# Altium PCB JDY-23.PcbDoc
Units mm, origin at the board's own origin, x right, y up, seen from the top; angles counter-clockwise.
Board outline 29.14 x 29.14 mm, 2 copper layers (Top Layer, Bottom Layer); 2 components, 0 nets, 26 pads, 0 vias.
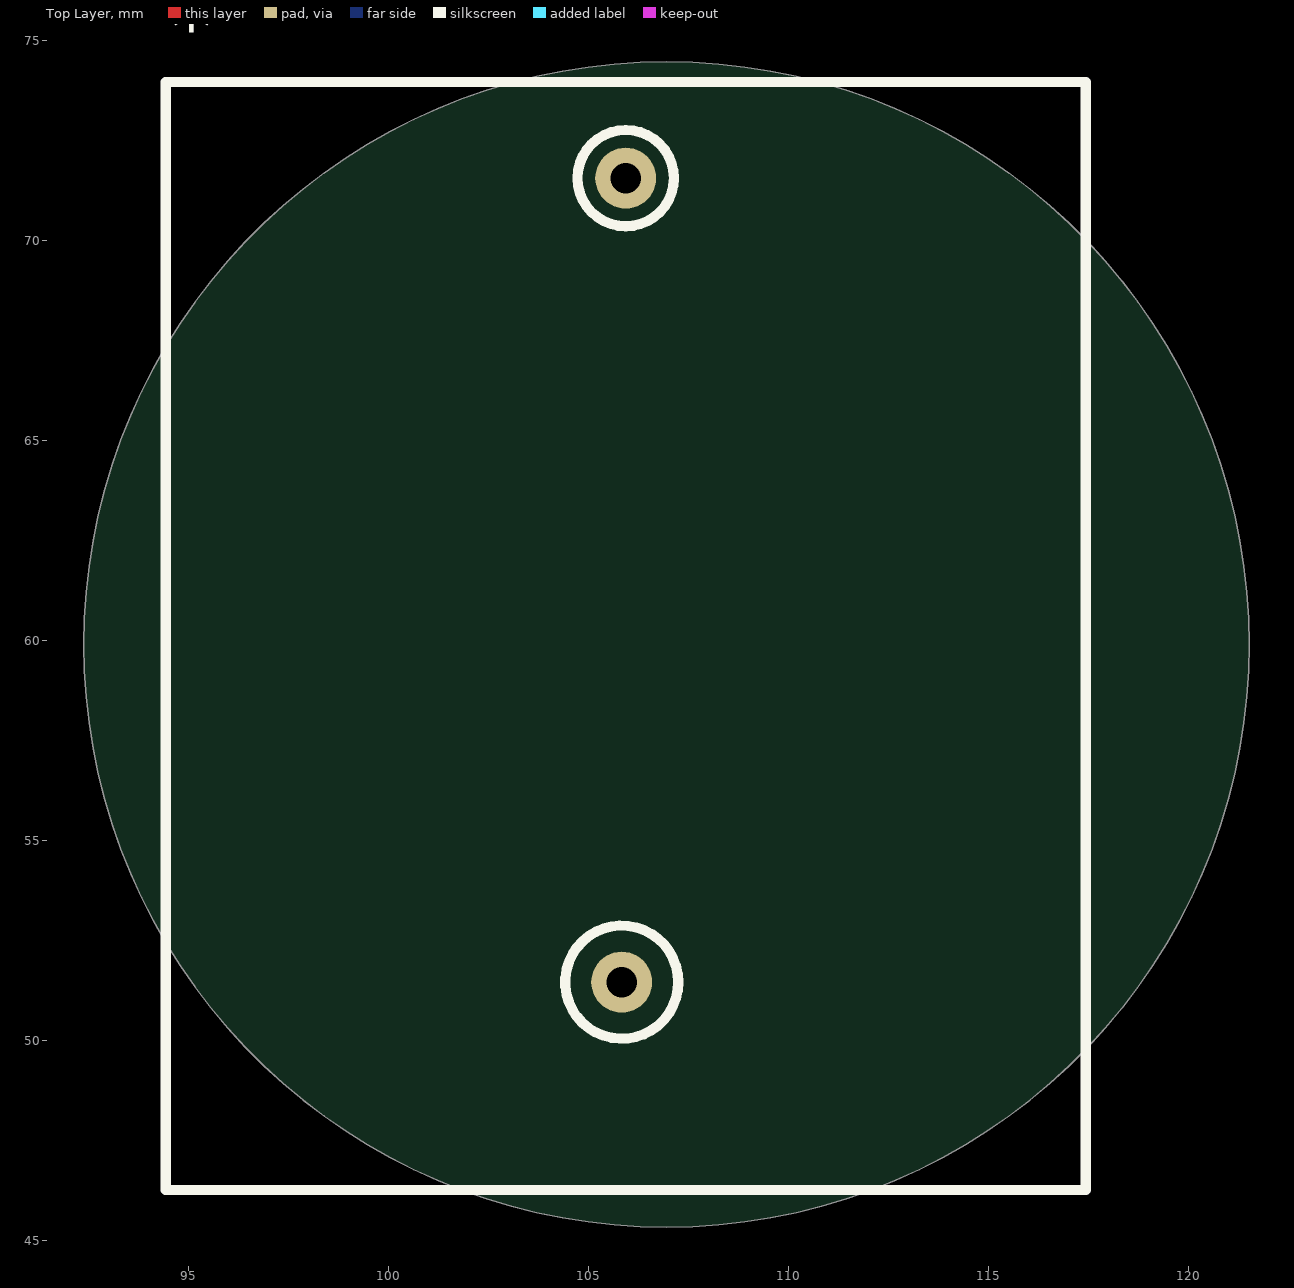
[diagram p0: Top Layer view]
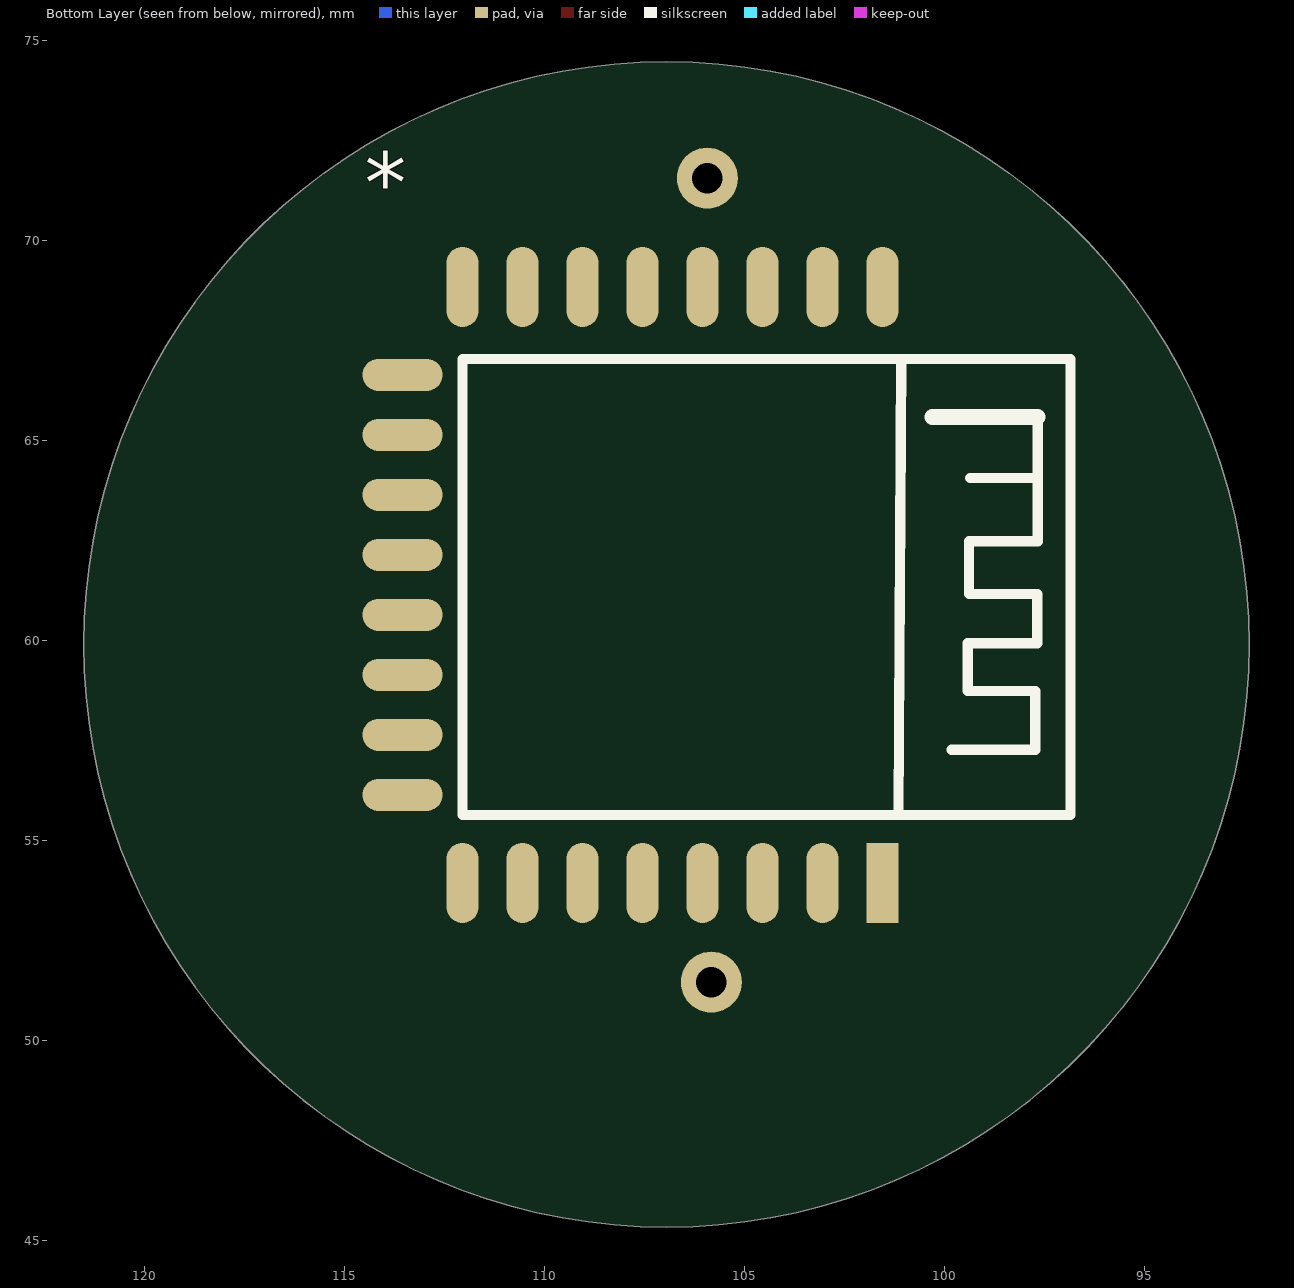
[diagram p1: Bottom Layer view, seen from below]

## Layer stack, top to bottom
Top Solder: solder mask 0.0102, Solder Resist, Dk 3.5
Top Layer: signal copper 0.0356
Dielectric 1: dielectric 0.32, FR-4, Dk 4.8
Bottom Layer: signal copper 0.0356
Bottom Solder: solder mask 0.0102, Solder Resist, Dk 3.5

## Board outline
92.392,59.9 ccw(c106.96,59.9) 106.96,45.332 ccw(c106.96,59.9) 121.528,59.9 ccw(c106.96,59.9) 106.96,74.468 ccw(c106.96,59.9)

## Design rules (kind name [scope] priority, off if disabled: settings)
Clearance [All] p1: gap=0.254 ignorepadtopadclearanceinfootprint=FALSE except(0: Arc-Hole Track-Hole SMDPad-Hole THPad-Hole Via-Hole Fill-Hole Poly-Hole Region-Hole Text-Hole; 0.5: Arc-Fill Arc-Poly Arc-Region Track-Fill Track-Poly Track-Region SMDPad-Fill SMDPad-Poly SMDPad-Region THPad-Fill THPad-Poly THPad-Region Via-Fill Via-Poly Via-Region Fill-Fill Fill-Poly Fill-Region Poly-Poly Poly-Region Region-Region)
PolygonConnect [All] p1: connectstyle=Relief reliefconductorwidth=0.254 reliefentries=4 polygonreliefangle="90 Angle" airgapwidth=0.254
RoutingVias [All] p1: holewidth=0.711 width=1.27 viastyle="Through Hole" minholewidth=0.711 minwidth=1.27 maxholewidth=0.711 maxwidth=1.27
SolderMaskExpansion [All] p1: expansion=0.102 istentingtop=FALSE
Width [All] p1: maxlimit=1 minlimit=0.6 preferedwidth=0.8
30 further rules are at their usual default settings.

## Classes and differential pairs
component class JDY-23: *

## Components (designator, comment, footprint, x,y, rotation, side; value= is the part's Value field where it differs from the comment)
* "CR2032" CR2032 129.14,66.26 r180 top
* "U?" JDY-23 104.56,70.44 r270 bottom

## Footprints (in the part's own frame and the unit in brackets; to place one, negate y for a bottom-side part, rotate by r counter-clockwise, add the part's x,y. Pads: shape width x height; smd on the part's side, far side on the other; paste and mask are expansions set on the pad)
CR2032 [mil]
  round 60 hole 30: 1(913.39,-208.66) 2(917.32,582.68)
  silkscreen extent 461,-303 1366,787, body extent 462,-303 1368,786, height 394
JDY-23 [mm] "JDY-23"
  oval 2x0.8 smd: 1(1.6,3) 2(1.6,1.5) 3(1.6,0) 4(1.6,-1.5) 5(1.6,-3) 6(1.6,-4.5) 7(1.6,-6) 8(1.6,-7.5) 17(16.5,-7.5) 18(16.5,-6) 19(16.5,-4.5) 20(16.5,-3) 21(16.5,-1.5) 22(16.5,0) 23(16.5,1.5)
  oval 0.8x2 smd: 9(3.8,-9) 10(5.3,-9) 11(6.8,-9) 12(8.3,-9) 13(9.8,-9) 14(11.3,-9) 15(12.8,-9) 16(14.3,-9)
  rect 2x0.8 smd: 24(16.5,3)
  silkscreen extent 3.4,-7.5 14.8,7.7

## Part data
*: library part JDY-23, "JDY-23"

## Nets (pads, with @x,y where several pads share a name; then routed paths per layer and width w, separated by ;. In a path a pad name is that pad's centre, name@x,y a point inside that pad or via, vN(x,y) a via of type N, cw(c..) or ccw(c..) an arc to the next point about the centre after c; other vN are vias at no path point)
pads on no net: *.1 *.2 *.3 *.4 *.5 *.6 *.7 *.8 *.9 *.10 *.11 *.12 *.13 *.14 *.15 *.16 *.17 *.18 *.19 *.20 *.21 *.22 *.23 *.24

## Silkscreen, mask and mechanical layers (free items; w line width, h text height)
Mechanical 13:
  circle w0.254: c106.96,59.9 r14.568